# Altium PCB Buck120W_Layout.PcbDoc
Units mil, origin at the board's own origin, x right, y up, seen from the top; angles counter-clockwise.
Board outline 3160 x 2130 mil, 2 copper layers (Top Layer, Bottom Layer); 26 components, 17 nets, 73 pads, 0 vias.
Unrouted connection lines stored in the file: 36.
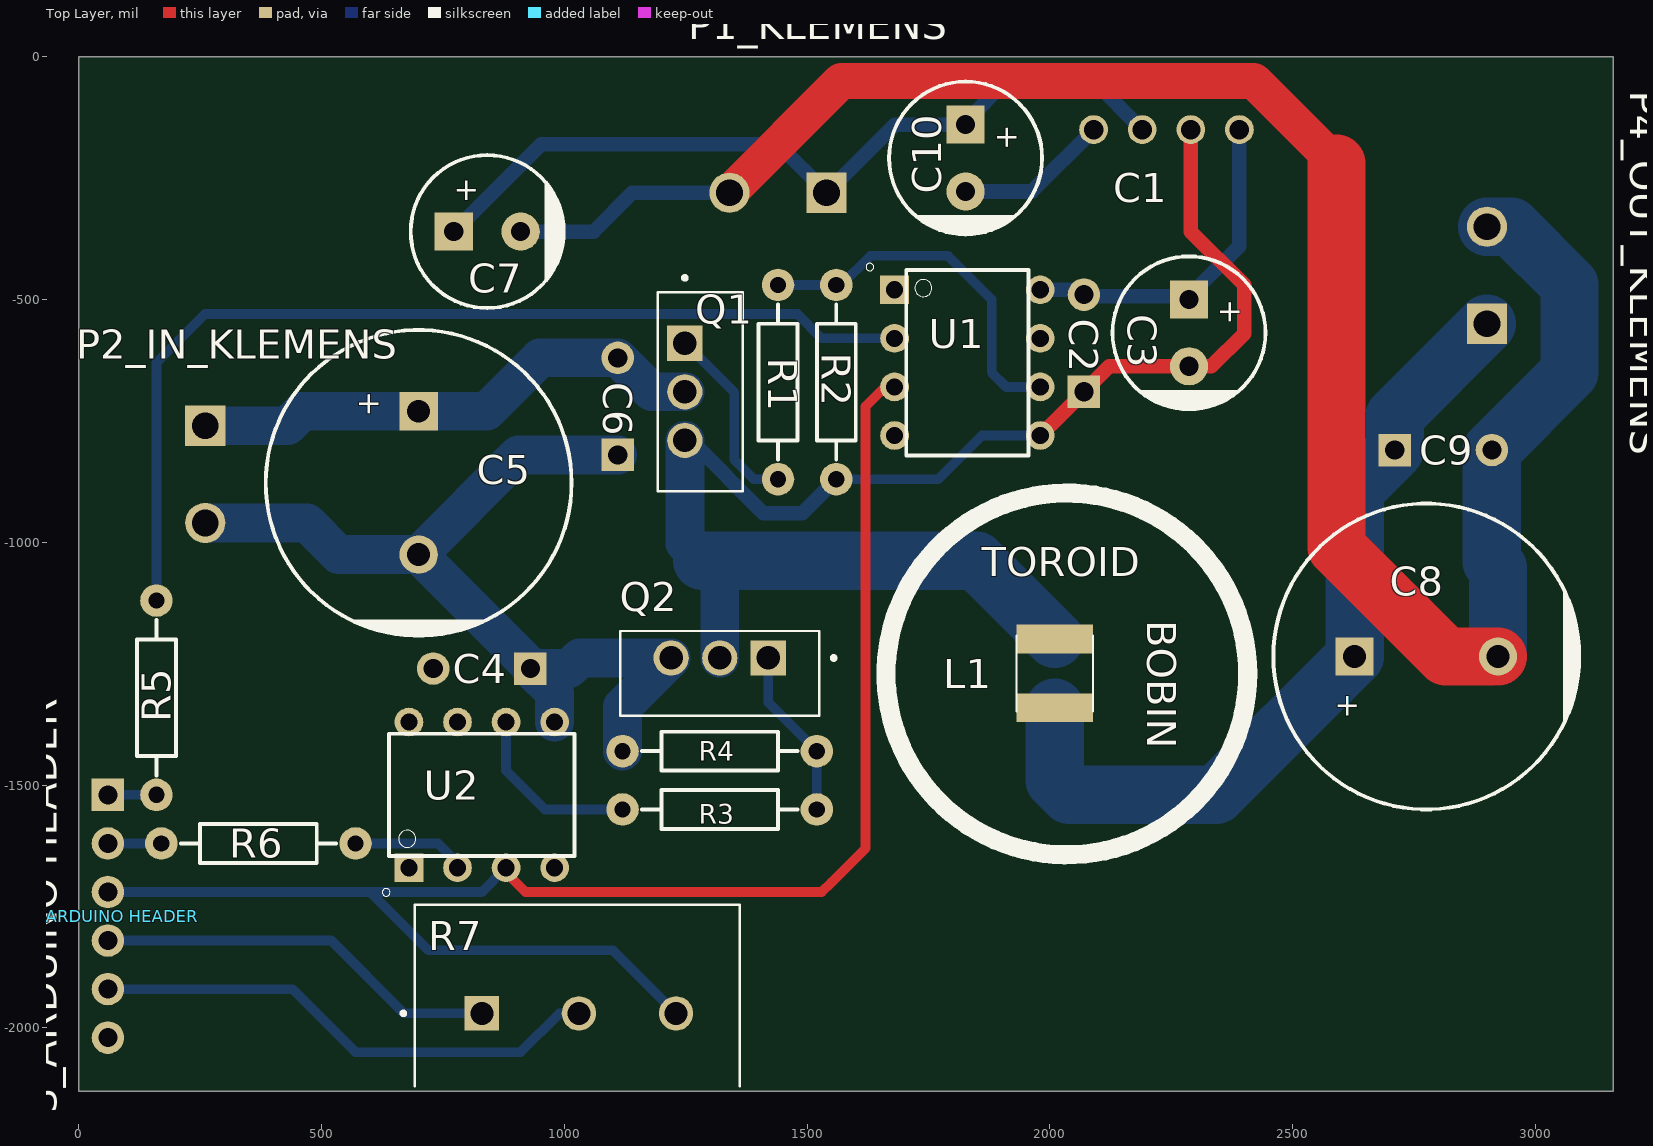
[diagram p0: Top Layer view]
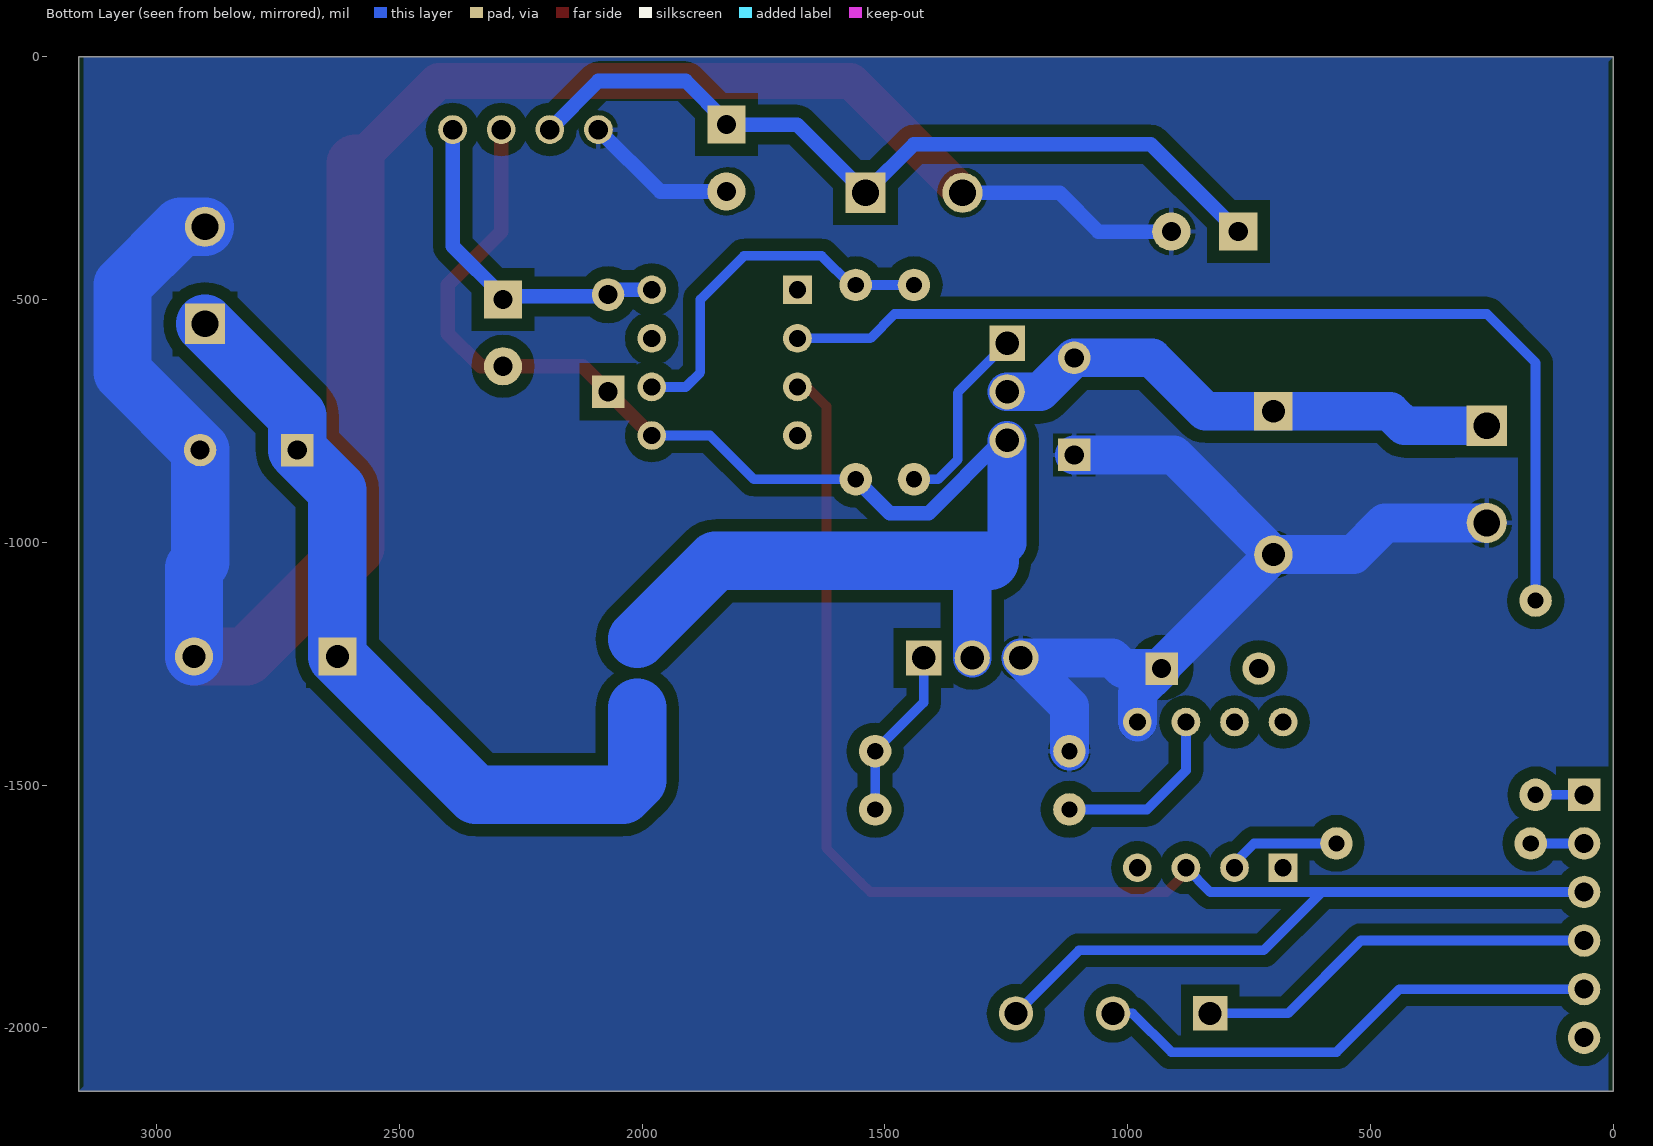
[diagram p1: Bottom Layer view, seen from below]

## Layer stack, top to bottom
Top Solder: solder mask 0.4, Solder Resist, Dk 3.5
Top Layer: signal copper 1.4
Dielectric 1: dielectric 12.6, FR-4, Dk 4.8
Bottom Layer: signal copper 1.4
Bottom Solder: solder mask 0.4, Solder Resist, Dk 3.5

## Board outline
0,-2130 3160,-2130 3160,0 0,0

## Design rules (kind name [scope] priority, off if disabled: settings)
Clearance Clearance_Ploy [InPolygon] p1: gap=25 ignorepadtopadclearanceinfootprint=FALSE except(10: THPad-THPad)
Clearance Clearance_HV [InNetClass('POWER_HV')] p2: gap=20 ignorepadtopadclearanceinfootprint=FALSE
Clearance [InNetClass('All Nets')] p3: gap=10 ignorepadtopadclearanceinfootprint=FALSE except(0: Arc-Hole Track-Hole SMDPad-Hole THPad-Hole Via-Hole Fill-Hole Poly-Hole Region-Hole Text-Hole)
PolygonConnect Direct_PWR [InNetClass('POWER_HV')] p1: thpad.connectstyle=Direct thpad.reliefconductorwidth=10 thpad.reliefentries=4 thpad.polygonreliefangle="90 Angle" thpad.airgapwidth=10 smdpad.connectstyle=Direct smdpad.reliefconductorwidth=10 smdpad.reliefentries=4 smdpad.polygonreliefangle="90 Angle" smdpad.airgapwidth=10 via.connectstyle=Relief via.reliefconductorwidth=10 via.reliefentries=4 via.polygonreliefangle="90 Angle" via.airgapwidth=10
PolygonConnect [All] p2: connectstyle=Relief reliefconductorwidth=10 reliefentries=4 polygonreliefangle="90 Angle" airgapwidth=10
RoutingVias [All] p1: holewidth=28 width=50 viastyle="Through Hole" minholewidth=28 minwidth=50 maxholewidth=28 maxwidth=50
SolderMaskExpansion [All] p1: expansion=4 istentingtop=FALSE
Width Width_PWR [InNetClass('POWER_HV')] p1: maxlimit=400 minlimit=40 preferedwidth=140 minimp=50.000000 maximp=50.000000 favimp=50.000000
Width [All] p2: maxlimit=10 minlimit=10 preferedwidth=10
30 further rules are at their usual default settings.

## Components (designator, comment, footprint, x,y, rotation, side; value= is the part's Value field where it differs from the comment)
C1 "B1212S-1W" CONV_VIBLSD1-S12-S12-SIP 2090,-150 r0 top
C2 "100nF" PCBComponent_1H 2070,-690 r90 top
C3 "47 µF" "CAP 8X12.5" 2290,-570 r270 top
C4 "100nF" PCBComponent_1H 930,-1260 r180 top
C5 "470µF" "CAP 16X33" 710,-877.64 r90 top
C6 "100nF" PCBComponent_1H 1110,-820 r90 top
C7 "47 µF" "CAP 8X12.5" 842.54,-356.35 r0 top
C8 "1000µF" "CAP 16X26.5" 2770,-1230 r180 top
C9 "100nF" PCBComponent_1H 2710,-810 r0 top
C10 "2.2µF" "CAP 8X12.5" 1830,-210 r270 top
L1 "Inductor" "Taiyo Yuden - Power Inductor, 5050WK" 2010,-1270 r270 top value=270uH
P1_KLEMENS "Header 2" PCBComponent_1K 1540,-280 r180 top
P2_IN_KLEMENS "Header 2" PCBComponent_1K 260.47,-759.91 r270 top
"P3_ARDUINO HEADER" "Header 4H" HEADER6H 60,-1520 r270 top
P4_OUT_KLEMENS "Header 2" PCBComponent_1K 2900,-550 r90 top
Q1 "IRF3710PBF" TO254P1041X444X1930-3 1280,-690 r270 top
Q2 "IRF3710PBF" TO254P1041X444X1930-3 1320,-1270 r180 top
R1 "10 Ohms" AXIAL-0.4 1440,-670 r90 top
R2 "10K Ohms" AXIAL-0.4 1560,-670 r90 top
R3 "10 Ohms" AXIAL-0.4 1320,-1550 r0 top
R4 "10K Ohms" AXIAL-0.4 1320,-1430 r0 top
R5 "330 Ohms" AXIAL-0.4 160,-1320 r90 top
R6 "330 Ohms" AXIAL-0.4 370,-1620 r0 top
R7 "PTN16-A10220K1B1" POT_PTN16-A10220K1B1 830,-1970 r0 top
U1 "TLP250H(F)" DIP1016W50P254L966H380Q8P 1830,-630 r0 top
U2 "TLP250H(F)" DIP1016W50P254L966H380Q8P 830,-1520 r90 top

## Footprints (in the part's own frame and the unit in brackets; to place one, negate y for a bottom-side part, rotate by r counter-clockwise, add the part's x,y. Pads: shape width x height; smd on the part's side, far side on the other; paste and mask are expansions set on the pad)
AXIAL-0.4 [mm] "Axial Device, Thru-Hole; 2 Leads; 0.4 in Pin Spacing"
  round 1.7 hole 0.85: 1(-5.08,0) 2(5.08,0)
  silkscreen extent -4.06,-1.02 4.06,1.02, body extent -5.27,-0.64 5.27,0.63, height 2.53
"CAP 8X12.5" [mm]
  rect 2x2 hole 1: 1(-1.786,-0.093)
  round 2 hole 1: 2(1.714,-0.093)
  silkscreen extent -4.04,-4.09 3.96,3.91, body extent -4.04,-4.09 3.96,3.91, height 11.5
"CAP 16X26.5" [mm]
  rect 2x2 hole 1.2: 1(3.623,0.127)
  round 2 hole 1.2: 2(-3.877,0.127)
  silkscreen extent -8.13,-7.87 7.87,8.12, body extent -8.14,-7.87 7.87,8.13, height 26.5
"CAP 16X33" [mm]
  rect 2x2 hole 1.2: 1(3.75,0.254)
  round 2 hole 1.2: 2(-3.75,0.254)
  silkscreen extent -8,-7.75 8,8.25, body extent -8.01,-7.74 8,8.25, height 33
CONV_VIBLSD1-S12-S12-SIP [mil]
  round 59.37 hole 40 mask+4: 1(0,0)
  round 59.37 hole 40 mask+4.02: 2(100,0) 3(200,0) 4(300,0)
  body extent -85,-177 375,57, height 555
DIP1016W50P254L966H380Q8P [mm]
  rect 1.5x1.5 / inner round 1.5 / far side rect 1.5x1.5 hole 0.9: 1(-3.81,3.81)
  round 1.5 hole 0.9: 2(-3.81,1.27) 3(-3.81,-1.27) 4(-3.81,-3.81) 5(3.81,-3.81) 6(3.81,-1.27) 7(3.81,1.27) 8(3.81,3.81)
  silkscreen extent -5.3,-4.85 3.2,5.2, body extent -4.02,-5.09 4.02,5.09, height 4.51
HEADER6H [mm]
  rect 1.7x1.7 hole 1: 1(0,0)
  round 1.7 hole 1: 2(2.54,0) 3(5.08,0) 4(7.62,0) 5(10.16,0) 6(12.7,0)
  body extent -1.27,-1.27 15.24,1.27, height 8.5
PCBComponent_1H [mm]
  rect 1.7x1.7 hole 1: 1(0,0)
  round 1.7 hole 1: 2(5.08,0)
  body extent -0.51,-0.51 5.59,0.51, height 5.6
PCBComponent_1K [mm]
  rect 2.1x2.1 hole 1.4: 1(0,0)
  round 2.1 hole 1.4: 2(5.08,0)
  body extent -2.5,-7 7.5,2, height 15
POT_PTN16-A10220K1B1 [mm]
  rect 1.8x1.8 / inner round 1.8 / far side rect 1.8x1.8 hole 1.2: 1(0,0)
  round 1.8 hole 1.2: 2(5.08,0) 3(10.16,0)
  silkscreen extent -4.2,-3.81 13.5,5.69, body extent -3.43,-23.77 13.57,5.73, height 19.93
"Taiyo Yuden - Power Inductor, 5050WK" [mm] "Taiyo Yuden - Power Inductor, 5050WK"
  rect 1.5x4 smd mask+0.05: 1(-1.8,0) 2(1.8,0)
  silkscreen extent -2,-2 2,2, body extent -2.45,-2.45 2.45,2.45, height 3
TO254P1041X444X1930-3 [mm]
  rect 1.845x1.845 hole 1.23: 1(-2.54,-0.81)
  round 1.845 hole 1.23: 2(0,-0.81) 3(2.54,-0.81)
  silkscreen extent -6.06,-2.22 5.21,2.22, body extent -5.21,-2.29 5.21,2.16, height 19.3

## Part data
C1: "12V--12V, isolated"
C2 C4 C6 C9: library part "CAP 100NF 100V", "CAP 100NF 100V", LatestRevisionDate=17-Jul-2002, LatestRevisionNote="Re-released for DXP Platform.", PackageDescription="Radial Cap, Thru-Hole; 2 Leads; 0.3 in Pin Spacing", PackageReference=RAD-0.3, Published=8-Jun-2000, Publisher="Altium Limited"
C3 C7: "CAP ALUM 47UF 20% 35V RADIAL", Device Package="Radial, Can", Lifetime @ Temp.="2000 Hrs @ 85°C", Manufacturer=Nichicon, Operating Temperature="-40°C ~ 85°C", Part Number=UKL1V470MPD1TD, Ripple Current @ High Frequency="380 mA @ 10 kHz", Ripple Current @ Low Frequency="190 mA @ 120 Hz", Supplier Part Number 1=493-10519-1-ND, Tolerance=±20%, Voltage - Rated="35 V", Applications="General Purpose", Capacitance="47 µF", ComponentLink1Description=Datasheet, ComponentLink1URL=http://nichicon-us.com/english/products/pdfs/e-ukl.pdf, ComponentLink2Description="DigiKey Link", ComponentLink2URL=https://www.digikey.com/en/products/detail/nichicon/UKL1V470MPD1TD/4318008, Height - Seated (Max)="0.492\" (12.50mm)", LastUpdated="3.06.2024 20:06:12", Lead Spacing="0.138\" (3.50mm)", Lifecycle Status=Active, Minimum Order=1, Mounting Type="Through Hole", Package / Case="Radial, Can", Packaging=TapeAndBox, Part Status=Active, PartId=7194, Polarization=Polar, Price=0.16, Series=UKL, Size / Dimension="0.315\" Dia (8.00mm)", Supplier 1=DigiKey
C5: "100V 470UF 20% HIGH TEMP LEADED", Device Package="Radial, Can", ESR (Equivalent Series Resistance)="34mOhm @ 100kHz", Lifetime @ Temp.="3000 Hrs @ 135°C", Manufacturer=Nichicon, Operating Temperature="-40°C ~ 135°C", Part Number=UBY2A471MHL, Ripple Current @ High Frequency="3.86A @ 100kHz", Ripple Current @ Low Frequency="1.93A @ 120Hz", Supplier Part Number 1=493-17786-ND, Tolerance=±20%, Voltage - Rated=100V, Applications=Automotive, Capacitance=470µF, ComponentLink1Description=Datasheet, ComponentLink1URL=http://nichicon-us.com/english/products/pdfs/e-uby.pdf, ComponentLink2Description="DigiKey Link", ComponentLink2URL=http://digikey.com/product-detail/en/nichicon/UBY2A471MHL/493-17786-ND/9452720, Height - Seated (Max)="1.299\" (33.00mm)", LastUpdated="2.09.2020 01:33:02", Lead Spacing="0.295\" (7.50mm)", Lifecycle Status=Active, Minimum Order=1, Mounting Type="Through Hole", Package / Case="Radial, Can", Packaging=Bulk, Part Status=Active, PartId=17477, Polarization=Polar, Price=3.37, Series=UBY, Size / Dimension="0.630\" Dia (16.00mm)", Supplier 1=DigiKey
C8: "50V 1000UF 20% HIGH TEMP LEADED", Device Package="Radial, Can", ESR (Equivalent Series Resistance)="39mOhm @ 100kHz", Lifetime @ Temp.="3000 Hrs @ 135°C", Manufacturer=Nichicon, Operating Temperature="-40°C ~ 135°C", Part Number=UBY1J102MHL, Ripple Current @ High Frequency="2.94A @ 100kHz", Ripple Current @ Low Frequency="1.764A @ 120Hz", Supplier Part Number 1=493-17734-ND, Tolerance=±20%, Voltage - Rated=63V, Applications=Automotive, Capacitance=1000µF, ComponentLink1Description=Datasheet, ComponentLink1URL=http://nichicon-us.com/english/products/pdfs/e-uby.pdf, ComponentLink2Description="DigiKey Link", ComponentLink2URL=http://digikey.com/product-detail/en/nichicon/UBY1J102MHL/493-17734-ND/9452668, Height - Seated (Max)="1.043\" (26.50mm)", LastUpdated="2.09.2020 01:32:52", Lead Spacing="0.295\" (7.50mm)", Lifecycle Status=Active, Minimum Order=1, Mounting Type="Through Hole", Package / Case="Radial, Can", Packaging=Bulk, Part Status=Active, PartId=16723, Polarization=Polar, Price=2.63, Series=UBY, Size / Dimension="0.630\" Dia (16.00mm)", Supplier 1=DigiKey
C10: "CAP 2.2 UF 20% 250 V", Device Package="Radial, Can", Lifetime @ Temp.="1000 Hrs @ 125°C", Manufacturer="Würth Elektronik", Operating Temperature="-25°C ~ 125°C", Part Number=860131173002, Ripple Current @ High Frequency="71.4mA @ 100kHz", Ripple Current @ Low Frequency="42mA @ 120Hz", Supplier Part Number 1=732-9390-1-ND, Tolerance=±20%, Voltage - Rated=250V, Applications="General Purpose", Capacitance=2.2µF, ComponentLink1Description=Datasheet, ComponentLink1URL=https://katalog.we-online.de/pbs/datasheet/860131173002.pdf, ComponentLink2Description="DigiKey Link", ComponentLink2URL=http://digikey.com/product-detail/en/w-rth-elektronik/860131173002/732-9390-1-ND/5729328, Height - Seated (Max)="0.492\" (12.50mm)", LastUpdated="4.09.2020 01:05:47", Lead Spacing="0.098\" (2.50mm)", Lifecycle Status=Active, Minimum Order=1, Mounting Type="Through Hole", Package / Case="Radial, Can", Packaging=TapeAndBox, Part Status=Active, PartId=20330, Polarization=Polar, Price=0.20, Series=WCAP-ATET, Size / Dimension="0.248\" Dia (6.30mm)", Supplier 1=DigiKey
L1: library part "IND 270UH", "Inductor, Power, 270UH 8A", Operating Temperature, Max=*℃, Component Category=Inductor, Component Type="Power Inductor", ComponentLink1Description=Datasheet, ComponentLink2Description="Supplier Link", Operating Temperature, Min=*℃
P1_KLEMENS P2_IN_KLEMENS P4_OUT_KLEMENS: "Header, 2-Pin", LatestRevisionDate=17-Jul-2002, LatestRevisionNote="Re-released for DXP Platform.", Publisher="Altium Limited"
"P3_ARDUINO HEADER": library part "Header 6H", "Header, 4-Pin, Right Angle", LatestRevisionDate=17-Jul-2002, LatestRevisionNote="Re-released for DXP Platform.", Publisher="Altium Limited"
Q1 Q2: "N-MOSFET 100V 57A 23mR", Package="TO-220 Infineon", Availability="In Stock", Check_prices=https://www.snapeda.com/parts/IRF530NPBF/Infineon+Technologies/view-part/?ref=eda, MF="Infineon Technologies", MP=IRF530NPBF, Price=None, Purchase-URL=https://pricing.snapeda.com/search/part/IRF530NPBF/?ref=eda, SnapEDA_Link=https://www.snapeda.com/parts/IRF530NPBF/Infineon+Technologies/view-part/?ref=snap
R1 R3: "RES 10 1/4W", Device Package="0805 (2012 Metric)", Manufacturer="KOA Speer Electronics, Inc.", Operating Temperature="-55°C ~ 170°C", Part Number=TLRZ2ATTD, Ratings=AEC-Q200, Resistance="0 Ohms", Supplier Device Package=0805, Supplier Part Number 1=2019-TLRZ2ATTDCT-ND, Tolerance=Jumper, ComponentLink1Description=Datasheet, ComponentLink1URL=http://www.koaspeer.com/catimages/Products/TLRZ/TLRZ.pdf, ComponentLink2Description="DigiKey Link", ComponentLink2URL=https://www.digikey.com/en/products/detail/koa-speer-electronics-inc/TLRZ2ATTD/9845494, Composition="Metal Element", Features="Automotive AEC-Q200, Current Sense", Height - Seated (Max)="0.022\" (0.55mm)", LastUpdated="8.02.2024 21:02:39", Lifecycle Status=Active, Minimum Order=1, Number of Terminations=2, Package / Case="0805 (2012 Metric)", Packaging=TapeAndReel, Part Status=Active, PartId=27685, Price=0.08, Series=TLRZ, Size / Dimension="0.079\" L x 0.049\" W (2.00mm x 1.25mm)", Supplier 1=DigiKey
R2 R4: "RES 10K 1/4W", Device Package="0805 (2012 Metric)", Manufacturer="KOA Speer Electronics, Inc.", Operating Temperature="-55°C ~ 170°C", Part Number=TLRZ2ATTD, Ratings=AEC-Q200, Resistance="0 Ohms", Supplier Device Package=0805, Supplier Part Number 1=2019-TLRZ2ATTDCT-ND, Tolerance=Jumper, ComponentLink1Description=Datasheet, ComponentLink1URL=http://www.koaspeer.com/catimages/Products/TLRZ/TLRZ.pdf, ComponentLink2Description="DigiKey Link", ComponentLink2URL=https://www.digikey.com/en/products/detail/koa-speer-electronics-inc/TLRZ2ATTD/9845494, Composition="Metal Element", Features="Automotive AEC-Q200, Current Sense", Height - Seated (Max)="0.022\" (0.55mm)", LastUpdated="8.02.2024 21:02:39", Lifecycle Status=Active, Minimum Order=1, Number of Terminations=2, Package / Case="0805 (2012 Metric)", Packaging=TapeAndReel, Part Status=Active, PartId=27685, Price=0.08, Series=TLRZ, Size / Dimension="0.079\" L x 0.049\" W (2.00mm x 1.25mm)", Supplier 1=DigiKey
R7: "16.5 mm, Horizontal, Linear, 10 kÎ©, Through Hole, Knurled Shaft Single Section Rotary Potentiometer", Package=Package, Check_prices=https://www.snapeda.com/parts/PTN16-A10220K1B1/Same+Sky/view-part/?ref=eda, MF="Same Sky", MP=PTN16-A10220K1B1, SnapEDA_Link=https://www.snapeda.com/parts/PTN16-A10220K1B1/Same+Sky/view-part/?ref=snap
U1 U2: "3750Vrms 2.5A  1 Channel 40kV/Âµs 8-DIP Logic Output Optoisolator - Push-Pull, Totem Pole", Package="DIP-8 Toshiba", Check_prices=https://www.snapeda.com/parts/TLP250H(F)/Toshiba/view-part/?ref=eda, MF=Toshiba, MP=TLP250H(F), SnapEDA_Link=https://www.snapeda.com/parts/TLP250H(F)/Toshiba/view-part/?ref=snap

## Nets (pads, with @x,y where several pads share a name; then routed paths per layer and width w, separated by ;. In a path a pad name is that pad's centre, name@x,y a point inside that pad or via, vN(x,y) a via of type N, cw(c..) or ccw(c..) an arc to the next point about the centre after c; other vN are vias at no path point)
5V_IN: "P3_ARDUINO HEADER.4" R7.1
12V_IN: C1.2 C4.2 C7.1 C10.1 P1_KLEMENS.1 U2.8
48V_IN: C5.1 C6.2 P2_IN_KLEMENS.1 Q1.2
H_IN: "P3_ARDUINO HEADER.1" R5.1
HS_GND: C1.3 C2.1 C3.2 L1.1 Q1.3 Q2.2 R2.1 U1.5
L_IN: "P3_ARDUINO HEADER.2" R6.1
NetC1_4: C1.4 C2.2 C3.1 U1.8
NetC8_1: C8.1 C9.1 L1.2 P4_OUT_KLEMENS.1
NetQ1_1: Q1.1 R1.2 R2.2
NetQ2_1: Q2.1 R3.2 R4.2
NetR1_1: R1.1 U1.6
NetR3_1: R3.1 U2.6
NetR5_2: R5.2 U1.2
NetR6_2: R6.2 U2.2
PGND: C1.1 C4.1 C5.2 C6.1 C7.2 C8.2 C9.2 C10.2 P1_KLEMENS.2 P2_IN_KLEMENS.2 P4_OUT_KLEMENS.2 Q2.3 R4.1 U2.5 | length 6407.7
  Top Layer w75: P1_KLEMENS.2 1570,-50 2420,-50 2590,-220
  Top Layer w120: 2590,-220 2590,-1010 2815,-1235 C8.2
  Bottom Layer w30: C7.2 1060,-360 1140,-280 P1_KLEMENS.2 ; C10.2 1962.54,-277.46 C1.1
  Bottom Layer w80: P2_IN_KLEMENS.2@270,-960 470,-960 535.28,-1025.28 C5.2 ; C4.1@930,-1255.28 C5.2 ; U2.5 980,-1310 C4.1 1010,-1260 1031.89,-1238.11 Q2.3 1120,-1338.11 R4.1 ; C6.1 905.28,-820 C5.2
  Bottom Layer w120: P4_OUT_KLEMENS.2 2950,-350 3070,-470 3070,-650 C9.2 2910,-1040 2922.64,-1052.64 C8.2
POT_S: "P3_ARDUINO HEADER.5" R7.2
SGND: "P3_ARDUINO HEADER.3" R7.3 U1.3 U2.3
pads on no net: "P3_ARDUINO HEADER.6" U1.1 U1.4 U1.7 U2.1 U2.4 U2.7
copper on no net: | length 17912.2
  Top Layer w20: 880,-1680 920,-1720 1530,-1720 1550,-1700 1620,-1630 1620,-720 1660,-680 1680,-680
  Top Layer w30: 1980,-780 2020,-740 2122.54,-637.46 2332.54,-637.46 2400,-570 2400,-470 2290,-360 2290,-150
  Bottom Layer w20: 60,-1920 440,-1920 570,-2050 910,-2050 990,-1970 1030,-1970 ; 60,-1820 520,-1820 670,-1970 830,-1970 ; 60,-1720 600,-1720 ; 60,-1620 170,-1620 ; 60,-1520 160,-1520 ; 160,-1120 160,-630 260,-530 1080,-530 1480,-530 1530,-580 1660,-580 ; 570,-1620 740,-1620 780,-1660 780,-1680 ; 880,-1670 830,-1720 600,-1720 ; 880,-1370 880,-1470 960,-1550 1120,-1550 ; 1230,-1960 1230,-1970 1100,-1840 720,-1840 600,-1720 ; 1248.11,-590 1350,-691.89 1350,-830 1390,-870 1440,-870 ; 1420,-1238.11 1420,-1330 1520,-1430 1520,-1550 ; 1440,-470 1560,-470 1570,-470 1630,-410 1790,-410 1880,-500 1880,-650 1910,-680 1980,-680 ; 1560,-870 1770,-870 1860,-780 1960,-780
  Bottom Layer w30: 772.2,-360 952.2,-180 1430,-180 1440,-180 1540,-280 ; 1340,-290 1340,-280 ; 1530,-280 1540,-280 ; 1560,-870 1490,-940 1410,-940 1260,-790 ; 1807.8,-280 1820,-267.8 ; 1980,-480 2060,-480 2073.65,-493.65 2286.35,-493.65 2390,-390 2390,-150 ; 2190,-150 2090,-50 1910,-50 1826.35,-133.65 1826.35,-139.67 1680.33,-139.67 1540,-280 ; 1260,-790 1248.11,-790 1260,-790
  Bottom Layer w80: 270,-760 430,-760 460,-730 700,-730 840,-730 950,-620 1110,-620 1180,-690 1248.11,-690 ; 930,-1260 930,-1255.28 ; 1248.11,-790 1248.11,-1001.89 1320,-1073.78 1320,-1238.11
  Bottom Layer w120: 1284.06,-1037.83 1848.7,-1037.83 2010,-1199.13 ; 2010,-1340.87 2010,-1490 2040,-1520 2342.36,-1520 2627.36,-1235 2627.36,-892.64 2710,-810 2710,-740 2900,-550

## Polygon pours and split planes (outlines as drawn)
PGND on Bottom Layer "NONET_L-01_P-001" (solid, remove dead copper, pour order 0): 3150,0 3150,-2120 3160,-2130 10,-2130 10,-10 0,0

## Silkscreen, mask and mechanical layers (free items; w line width, h text height)
Top Overlay:
  circle w39.37: c2034.87,-1271 r372.4
  text "TOROID" at 1860,-1070 h60
  text "BOBIN" at 2200,-1160 h60 r270
Mechanical 1:
  lines w20: 1010,-1970 1030,-1970

## Text inside footprints (layer, text, board x,y; h text height)
C3: Top Overlay "+" at 2335.56,-499.67 h78.74 r270
C5: Top Overlay "+" at 633.07,-741.81 h78.74 r90
C7: Top Overlay "+" at 772.2,-310.79 h78.74
C8: Top Overlay "+" at 2639.17,-1301.93 h78.74 r180
C10: Top Overlay "+" at 1875.56,-139.67 h78.74 r270
R7: Mechanical 13 "PCB Edge" at 1391.02,-2107.8 h35.43